# EAGLE board PR9025 (EAGLE 6.6.0)
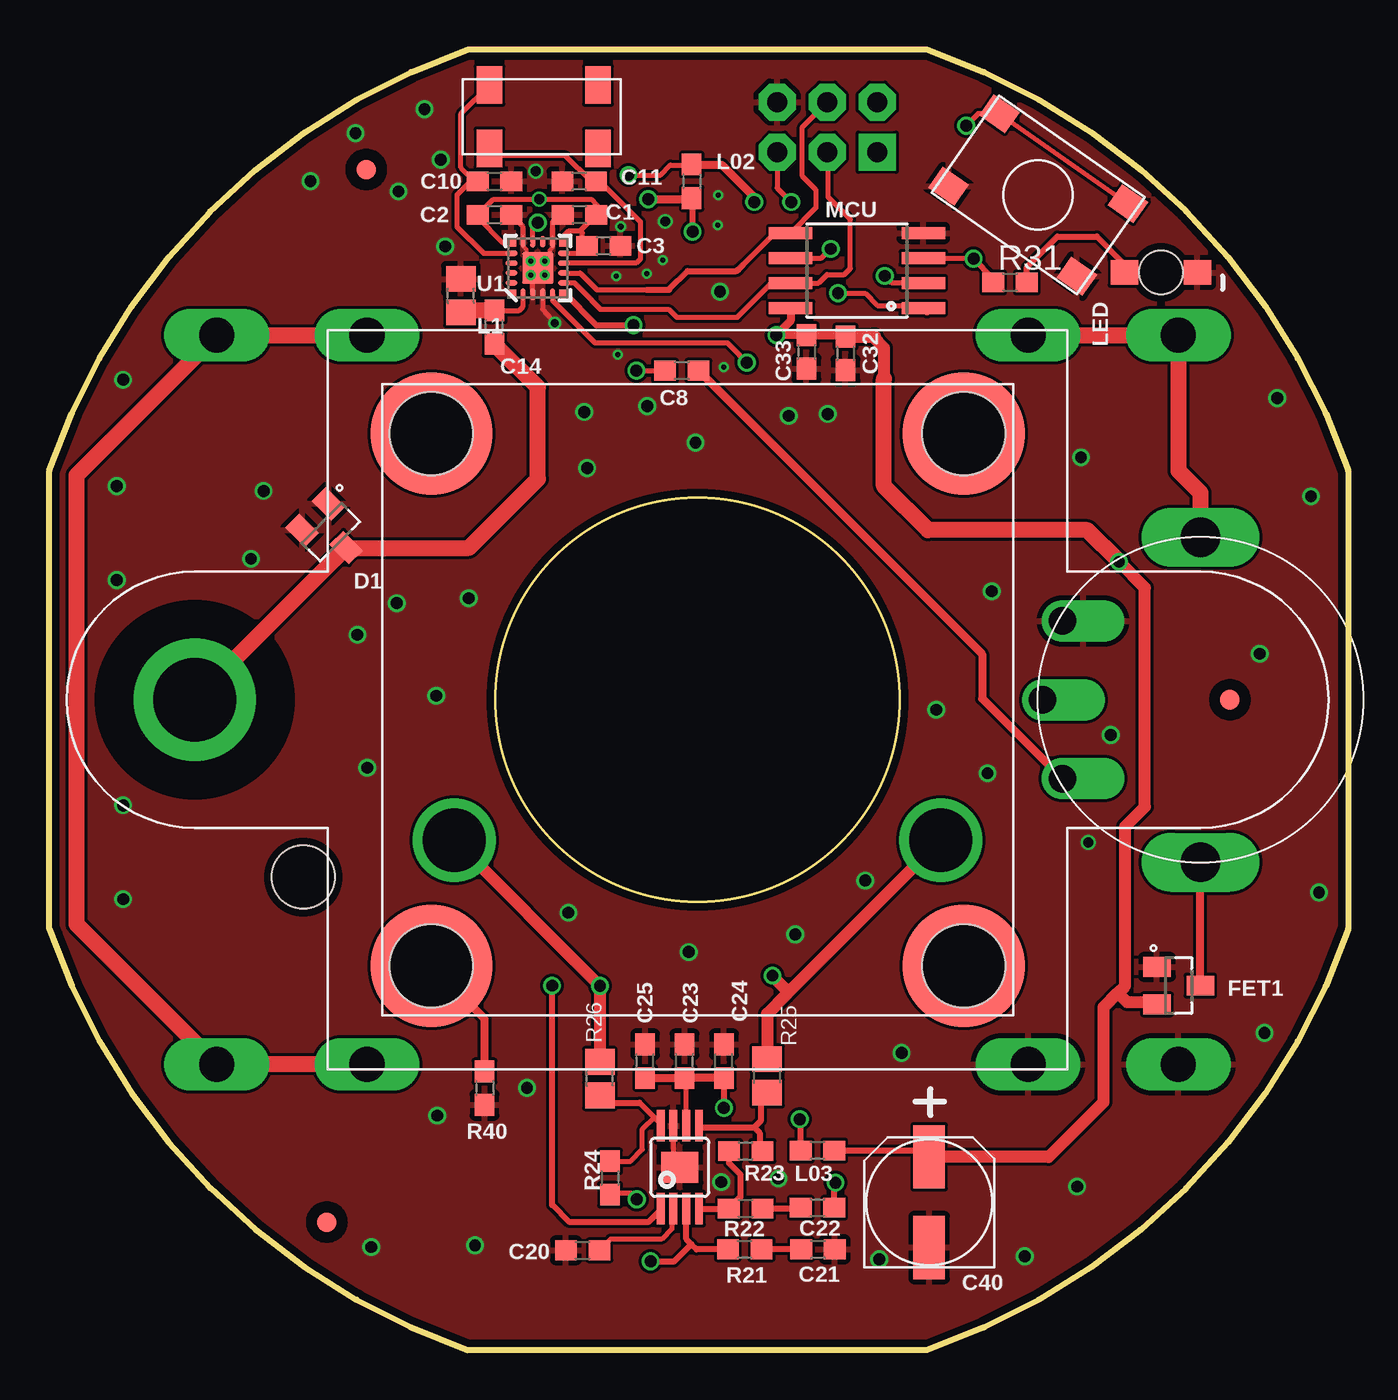
[diagram p0: board, top side]
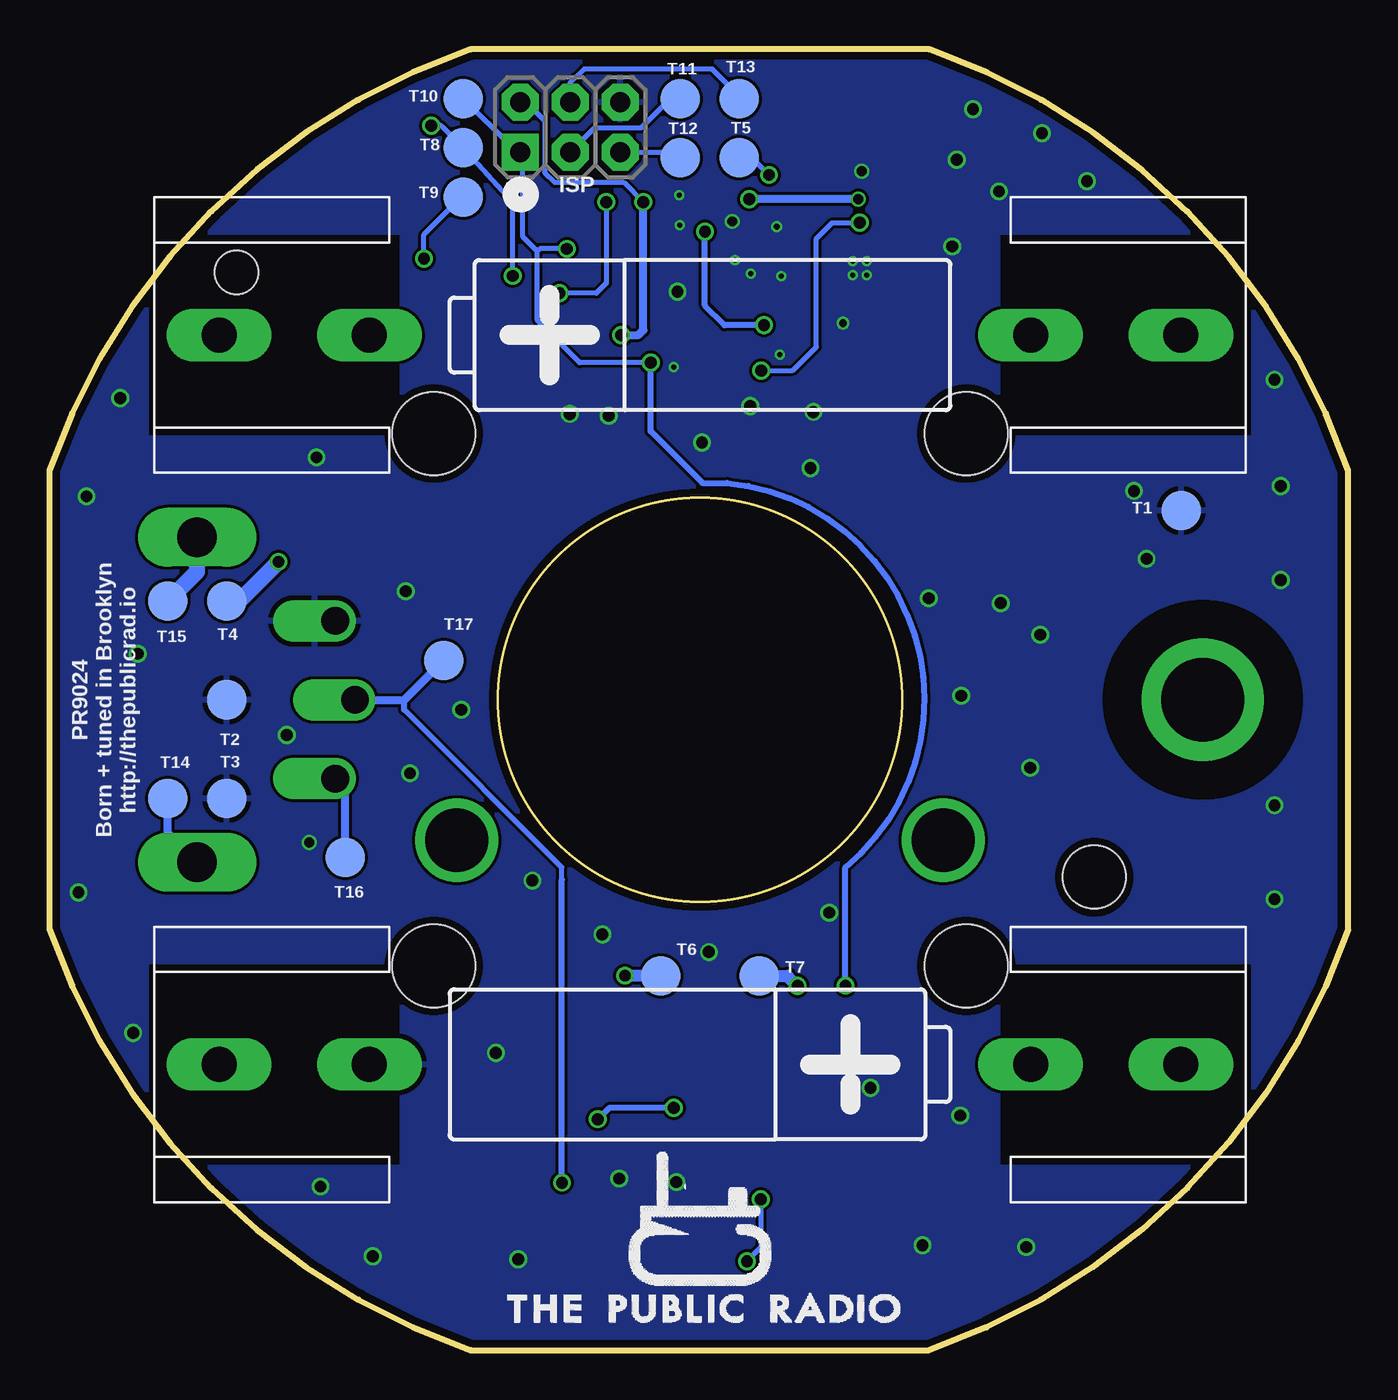
[diagram p1: board, bottom side, seen from below]

Size 65.88 x 66 mm. Coordinates in mm from the lower left corner, seen from the top.
Outline: 44.5,66 21.25,66 arc52 0,44.62 0,21.38 arc52 21.25,0 44.5,0
Outline: 44.52,0 44.5,0
Outline: 44.5,66 arc-52 65.88,44.62 65.88,21.38 arc-52 44.5,0
Copper layers (1*16): Top 0.0356mm / dielectric 1.5011mm / Bottom 0.0356mm
Design rules "LaenPCBOrder *": minimum track width 6mil, minimum drill 13mil, track to track 6mil, track to pad 6mil, pad to pad 6mil, via to via 6mil, smd to smd 6mil, copper to edge 15mil, drill to drill 6mil, minimum pad ring 7mil, minimum via ring 5mil, stop-mask expansion 3mil, vias tented up to drill 0mil, thermal gap 10mil
Net classes: 1 antenna: clearance 1.27 mm
Holes 3.2 mm at 12.88,24
tRestrict: area 24,54.1 to 25.6,55.7; 8 lines

## Footprints (pad centres in the part's own frame; a part is rotated, then mirrored left to right if it is on the bottom)
8-MSOP = smd 0.4 x 1.6: 1 -0.975,-2.1; 2 -0.325,-2.1; 3 0.325,-2.1; 4 0.975,-2.1; 5 0.975,2.1; 6 0.325,2.1; 7 -0.325,2.1; 8 -0.975,2.1 | smd 1.89 x 1.57: 9 0,0
PEM_M3 = drill 4.22 pad 6.2: P$2 0,0
0603_CPL = smd 1.1 x 1: 1 -0.85,0; 2 0.85,0
NICHICON_UD_63 = smd 1.6 x 3.2: P$1 0,2.3; P$2 0,-2.3
SOT23_CPL = smd 1.4 x 1: 1 -1.1,0.95; 2 -1.1,-0.95; 3 1.1,0
2X3-NS = drill 1.016 pad 1.88 square: 1 -2.54,-1.27 | drill 1.016 pad 1.88 octagon: 2 -2.54,1.27; 3 0,-1.27; 4 0,1.27; 5 2.54,-1.27; 6 2.54,1.27
BK92_AA_BATT = drill 1.778 long: NEG -24.384,0; NEG@2 -16.764,0; POS 16.764,0; POS@2 24.384,0
0805_ADAFRUIT = smd 1.3 x 1.5: 1 -0.85,0; 2 0.85,0
HSMC-C265_REVERSE_MOUN_LED = smd 1.4 x 1.25: P$1 -1.85,0; P$2 1.85,0 | hole 2.2: 0,0
FIDUCIAL_1MM = smd 1 x 1: 1 0,0
8-SOIC = smd 0.61 x 2.21: 1 -1.905,-3.378; 2 -0.635,-3.378; 3 0.635,-3.378; 4 1.905,-3.378; 5 1.905,3.353; 6 0.635,3.353; 7 -0.635,3.353; 8 -1.905,3.353
H17112NS_A10K_L20F-002 = drill 1.4 offset: GND -4,-7; SIGNAL 4,-7; WIPER 0,-8 | drill 2 long: SW_IN 8.25,0; SW_OUT -8.25,0
PR2024_SPKR_PLACE(SMD) = drill 3.2: P$5 -12.341,-7.125; P$6 12.341,-7.125
C&K_PTS645_SMT = smd 1.6 x 1.3: P$1 -3.975,2.25; P$2 3.975,2.25; P$3 -3.975,-2.25; P$4 3.975,-2.25
TP20R = smd 2 x 2: TP 0,0
SI470X_20_QFN = smd 0.34 x 0.34: 1 -1.275,1.265; 6 -1.265,-1.265; 11 1.265,-1.265; 16 1.265,1.265 | smd 0.61 x 0.28: 2 -1.335,0.75; 3 -1.335,0.25; 4 -1.335,-0.25; 5 -1.335,-0.75; 12 1.335,-0.75; 13 1.335,-0.25; 14 1.335,0.25; 15 1.335,0.75 | smd 0.28 x 0.61: 7 -0.75,-1.335; 8 -0.25,-1.335; 9 0.25,-1.335; 10 0.75,-1.335; 17 0.75,1.335; 18 0.25,1.335; 19 -0.25,1.335; 20 -0.75,1.335 | smd 1.6 x 1.6: 21 0,0
PEM_SMT = smd 6.2 x 6.2: P$1 0,0 | hole 4.22: 0,0
4-SOJ = smd 1.3 x 1.9: P$1 -2.75,-1.6; P$2 2.75,-1.6; P$3 2.75,1.6; P$4 -2.75,1.6

## Placement (x,y rotation side)
AMP  [8-MSOP]  31.98,9.29 0 top
ANT_MOUNT  DNP  [PEM_M3]  7.38,33 0 top
C1  22nF  [0603_CPL]  26.89,57.6 180 top
C2  22nF  [0603_CPL]  22.57,57.6 0 top
C3  .1uF  [0603_CPL]  28.11,56.03 0 top
C8  1uF  [0603_CPL]  32.08,49.7 0 top
C10  22pF  [0603_CPL]  22.57,59.3 0 top
C11  22pF  [0603_CPL]  26.88,59.3 180 top
C14  47pF  [0603_CPL]  22.57,51.9 90 top
C20  .22uF  [0603_CPL]  27.05,5.06 0 top
C21  .22uF  [0603_CPL]  38.99,5.12 180 top
C22  .22uF  [0603_CPL]  38.96,7.23 0 top
C23  .1uF  [0603_CPL]  32.22,14.66 90 top
C24  1uF  [0603_CPL]  34.22,14.66 90 top
C25  10uF  [0603_CPL]  30.22,14.66 90 top
C32  10uF  [0603_CPL]  40.38,50.58 270 top
C33  .1uF  [0603_CPL]  38.4,50.65 270 top
C40  220uF  [NICHICON_UD_63]  44.62,7.51 0 top
D1  [SOT23_CPL]  14.27,41.5 315 top
FET1  [SOT23_CPL]  57.27,18.5 0 top
ISP  [2X3-NS]  39.45,62.05 0 bottom
JP5  [BK92_AA_BATT]  32.88,51.5 180 bottom
JP6  [BK92_AA_BATT]  32.88,14.5 0 bottom
L1  180nH  [0805_ADAFRUIT]  20.88,53.5 90 top
L02  2.2k@100MHz  [0603_CPL]  32.58,59.3 270 top
L03  2.2k@100MHz  [0603_CPL]  38.96,10.13 180 top
LED  HSMC-C265_REVERSE_MOUNT_LED  [HSMC-C265_REVERSE_MOUN_LED]  56.38,54.67 0 top
MARK1  [FIDUCIAL_1MM]  14.07,6.5 0 top
MARK2  [FIDUCIAL_1MM]  16.07,59.9 0 top
MARK3  [FIDUCIAL_1MM]  59.88,33 0 top
MCU  [8-SOIC]  40.95,54.77 90 top
R1  VOLUME_POT  [H17112NS_A10K_L20F-002]  58.38,33 270 top
R21  12K  [0603_CPL]  35.27,5.12 180 top
R22  12K  [0603_CPL]  35.31,7.19 0 top
R23  100K  [0603_CPL]  35.32,10.11 0 top
R24  100K  [0603_CPL]  28.43,8.74 270 top
R25  0 ohm  [0805_ADAFRUIT]  36.41,13.92 90 top
R26  0 ohm  [0805_ADAFRUIT]  27.93,13.78 90 top
R31  1K  [0603_CPL]  48.73,54.17 0 top
R40  DNP  [0603_CPL]  22.07,13.3 270 top
SPKR_PLACE  DNP  [PR2024_SPKR_PLACE(SMD)]  32.88,33 0 top
SW1  C&K_PTS645  [C&K_PTS645_SMT]  50.15,58.61 145 top
T1  [TP20R]  8.47,42.6 0 bottom
T2  [TP20R]  56.88,33 0 bottom
T3  [TP20R]  56.88,28 0 bottom
T4  [TP20R]  56.88,38 0 bottom
T5  [TP20R]  30.88,60.5 0 bottom
T6  [TP20R]  34.88,19 0 bottom
T7  [TP20R]  29.88,19 0 bottom
T8  [TP20R]  44.88,61 0 bottom
T9  [TP20R]  44.88,58.5 0 bottom
T10  [TP20R]  44.88,63.5 0 bottom
T11  [TP20R]  33.88,63.5 0 bottom
T12  [TP20R]  33.88,60.5 0 bottom
T13  [TP20R]  30.88,63.5 0 bottom
T14  [TP20R]  59.88,28 0 bottom
T15  [TP20R]  59.88,38 0 bottom
T16  [TP20R]  50.88,25 0 bottom
T17  [TP20R]  45.88,35 0 bottom
U1  [SI470X_20_QFN]  24.77,54.9 90 top
U$1  [PR_LOGO]  32.88,7 0 bottom
U$2  PEM_SMT  [PEM_SMT]  19.38,46.5 0 top
U$3  PEM_SMT  [PEM_SMT]  46.38,46.5 0 top
U$4  PEM_SMT  [PEM_SMT]  46.38,19.5 0 top
U$5  PEM_M3_SMT_W/PIN  [PEM_SMT]  19.38,19.5 0 top
X1  [4-SOJ]  25.07,62.58 0 top

## Library data of the parts
AMP = PR_Parts_Library; MFG_PN: TPA6203A1DGNR
ANT_MOUNT R1 SPKR_PLACE U$1-U$5 = PR_Parts_Library
C1 C2 = PR_Parts_Library; MFG_PN: CL10B223KB8NNNC; TOL: 10%; VOLTAGE: 16V
C3 C23 C33 = PR_Parts_Library; MFG_PN: CL10B104KB8SFNC; TOL: 10%; VOLTAGE: 16V
C8 C24 = PR_Parts_Library; MFG_PN: CL10B105KP8NNNC; TOL: 10%; VOLTAGE: 10V
C10 C11 = PR_Parts_Library; MFG_PN: C1608C0G1H220J080AA; TOL: 5%; VOLTAGE: 50V
C14 = PR_Parts_Library; MFG_PN: CL10C470JB8NCNC; TOL: 5%; VOLTAGE: 50V
C20-C22 = PR_Parts_Library; MFG_PN: C1608X7R1C224K080AC; TOL: 10%; VOLTAGE: 16V
C25 C32 = PR_Parts_Library; MFG_PN: CL10A106MQ8NNNC; TOL: 20%; VOLTAGE: 6.3V
C40 = PR_Parts_Library; MFG_PN: UUD1C221MCL1GS; TOL: 20%; VOLTAGE: 16V
D1 = PR_Parts_Library; MFG_PN: BAV99,215
FET1 = PR_Parts_Library; MFG_PN: AO3435
ISP = PR_Parts_Library; MFG_PN: M20-9980346
JP5 JP6 = PR_Parts_Library; MFG_PN: 2 of BK92 - supplied by CL Labs
L1 = PR_Parts_Library; CURRENT: 400mA; DCR: 640m; MFG_PN: AISC-0805-R18J-T; TOL: 5%
L02 L03 = PR_Parts_Library; CURRENT: 150mA; DCR: 2.3; MFG_PN: HZ0603A222R-10
LED = PR_Parts_Library; MFG_PN: HSMC-C265
MARK1-MARK3 T1-T17 = PR_Parts_Library; MFG_PN: DNP
MCU = PR_Parts_Library; MFG_PN: ATTINY45-20SUR
R21 R22 = PR_Parts_Library; MFG_PN: RC0603FR-0712KL; POWER: 1/10W; TOL: 1%
R23 R24 = PR_Parts_Library; MFG_PN: ERJ-3EKF1003V; POWER: 1/10W; TOL: 1%
R25 R26 = PR_Parts_Library; MFG_PN: ERJ-6GEY0R00V
R31 = PR_Parts_Library; MFG_PN: 311-1.00KHRCT-ND
R40 = PR_Parts_Library; MFG_PN: ERJ-3GEY0R00V
SW1 = PR_Parts_Library; MFG_PN: PTS645SM43SMTR92 LFS
U1 = PR_Parts_Library; MFG_PN: Si4702 C19 GM - supplied by CL Labs
X1 = PR_Parts_Library; MFG_PN: ABS25-32.768KHZ-T

## Nets
3.3V: C1.1 C2.1 C3.1 L02.2 U1.6 U1.10 U1.11 U1.16
!RST: AMP.1 ISP.1 MCU.6 T10.TP U1.5
A_IN: C8.2 R1.SIGNAL T16.TP
A_OUT: C22.2 R1.WIPER T17.TP
ANT [antenna]: ANT_MOUNT.P$2 C14.1 D1.3
GND: AMP.7 AMP.9 C1.2 C2.2 C3.2 C10.2 C11.2 C20.1 C21.1 C23.2 C24.2 C25.2 C32.2 C33.2 C40.P$2 D1.1 D1.2 FET1.1 ISP.6 JP6.NEG JP6.NEG@2 L1.2 LED.P$2 MCU.4 R1.GND R40.2 SW1.P$1 SW1.P$2 T1.TP T2.TP T3.TP U1.3 U1.4 U1.12 U1.15 U1.21
GPIO1: U1.19
GPIO2: U1.18
LED/PB4: MCU.3 R31.1 T9.TP
N$1: C11.1 U1.9 X1.P$1
N$2: AMP.6 C23.1 C24.1 C25.1 L03.2
N$3: C22.1 R22.2
N$4: AMP.5 R23.2 R25.1
N$5: AMP.3 R21.2 R24.2
N$6: R40.1 U$5.P$1
N$7: LED.P$1 R31.2
N$9: C8.1 U1.14
N$10: C10.1 U1.17 X1.P$4
N$11: AMP.8 R24.1 R26.1
N$12: AMP.2 C20.2
N$13: JP5.NEG JP5.NEG@2 JP6.POS JP6.POS@2
N$14: AMP.4 R22.1 R23.1
N$16 [antenna]: C14.2 L1.1 U1.2
N$23: C21.2 R21.1
RESET: ISP.5 MCU.1 T12.TP
SCLK: ISP.3 MCU.7 T11.TP U1.7
SDIO: ISP.4 MCU.5 T13.TP U1.8
SPK_OUT+: R25.2 SPKR_PLACE.P$6 T6.TP
SPK_OUT-: R26.2 SPKR_PLACE.P$5 T7.TP
SW: MCU.2 SW1.P$3 SW1.P$4 T8.TP
SW_IN: FET1.3 R1.SW_IN T14.TP
SW_OUT: JP5.POS JP5.POS@2 R1.SW_OUT T15.TP
VCC: C32.1 C33.1 C40.P$1 FET1.2 ISP.2 L02.1 L03.1 MCU.8 T4.TP T5.TP

## Tracks (layer width: path | path; a pad name or v marks a point on that pad's centre or on a via)
3.3V  (via drill 0.5, 0.6)
  Top 0.254: 23.11,56.16 U1.16 23.48,56.2 22.98,56.2 21.73,57.45 C2.1 22.52,58.39 v24.86,58.39 27.48,58.39 27.77,58.1 27.77,57.64 C1.1 | U1.10 26.23,55.65 | U1.11 26.04,56.48 26.34,56.79 26.93,56.79 | 26.93,56.79 C1.1 | 27.68,57.66 C1.1 | U1.10 26.95,55.65 C3.1 | U1.10 26.8,55.65 27.04,55.88 27.04,56.68 26.93,56.79
  Top 0.305: U1.6 26.09,53.63 arc-45 26.13,53.62 27.75,52 v29.62,52 | v32.62,56.75 32.62,58.37 arc45 32.61,58.42 L02.2
  Top 0.406: v30.38,58.4 32.52,58.4 L02.2
  Top 0.61: L02.2 32.58,58.4
  Bottom 0.305: v29.62,52 31.6,52 arc45 31.64,52.02 32.62,53 v32.62,56.75
  Bottom 0.406: v24.86,58.39 30.16,58.39 v30.38,58.4
!RST  (via drill 0.6)
  Top 0.254: v35.38,50.1 34.98,50.5 35,50.5 34.4,51.1 27.68,51.1 25.52,53.25 U1.5 | MCU.6 39.16,55.41 v39.62,55.88 | AMP.1 31,6.88
  Top 0.305: AMP.1 31,7.12 30.38,6.5 26.38,6.5 25.5,7.38 v25.5,18.5
  Bottom 0.254: v39.62,55.88 41,55.88 41.12,55.75 | v35.38,50.1 38.98,50.1 41.12,52.25 41.12,55.75 | 41.12,55.75 41.88,56.5 41.88,60.66 ISP.1 42.24,61.03 42.41,61.03 T10.TP
  Bottom 0.305: v35.38,50.1 35.38,46.62 32.77,44.02 arc-45 32.72,44 31.5,44 arc135 25.5,24.5 v25.5,18.5
A_IN
  Top 0.406: C8.2 47.31,35.31 47.31,33.06 R1.SIGNAL
  Bottom 0.406: T16.TP 50.88,28.5 R1.SIGNAL
A_OUT  (via drill 0.6)
  Top 0.305: C22.2 39.81,8.44 v39.88,8.5
  Bottom 0.254: 39.88,23.88 39.88,24.5 47.88,32.5
  Bottom 0.305: v39.88,8.5 39.88,23.88 | 47.88,32.5 47.88,33
  Bottom 0.406: T17.TP 47.88,33 R1.WIPER
ANT
  Top 0.406: 22.73,51.05 C14.1
  Top 0.813: ANT_MOUNT.P$2 7.38,33.04 D1.3 15.07,40.7 21.27,40.7 24.77,44.2 24.77,48.85 C14.1
GND  (via drill 0.25, 0.25 pad 0.1, 0.3, 0.4, 0.5, 0.6)
  Top 0.2: U1.12 25.52,55.95 25.38,55.8 25.38,55.5 v25.12,55.25 | 24.21,55.46 v24.43,55.25 24.19,55.49 24.19,55.84 24.02,56 U1.15 | 25.02,54.44 v25.14,54.55
  Top 0.254: v25.12,55.25 U1.21 | v24.43,55.25 v24.43,55.24 24.44,55.23 | U1.15 24.02,57 C2.2 | U1.12 25.52,57.25 25.88,57.6 C1.2 | U1.4 25.02,52.8 v25.62,52.1 | U1.3 24.52,54.45 v24.43,54.55 | AMP.7 31.65,9.61 AMP.9
  Top 0.305: 31.65,9.13 AMP.9
  Top 0.406: 31.65,9.13 31.65,8.73 31.67,8.71
  other vias: 30.33,47.9 62.28,48.3 27.27,44.75 16.32,5.24 19.68,11.9 37.83,21.1 19.03,62.95 24.23,13.31 39.48,47.5 19.86,60.4 17.71,58.78 13.24,59.31 52.12,8.3 61.62,16.1 27.12,47.6 17.62,37.9 21.27,38.15 19.62,33.2 32.77,46.05 15.53,61.74 16.12,29.55 20.09,56 37.5,47.4 15.62,36.3 10.22,40.15 10.87,43.59 24.68,59.81 28.98,57 43.23,15.09 44.99,32.49 47.8,38.5 52.33,45.3 28.75,54.5 30.3,54.62 31.1,55.3 33.9,57.08 33.92,58.6 34.2,49.88 28.82,50.5 31.23,57.27 52.69,25.76 42.09,4.61 32.42,20.2 26.32,22.2 3.74,22.88 3.74,27.64 3.42,39.08 3.42,43.84 3.74,49.23 21.59,5.33 63.99,43.32 64.39,23.22 61.39,35.33 49.47,4.77 34.07,8.53 36.98,8.71 53.83,31.21 47.58,29.27 41.38,23.82 34.01,53.7
  pour Bottom: -0.12,66 65.88,66 65.88,0 -0.12,0
  pour Top: -0.12,66 65.88,66 65.88,0 -0.12,0
LED/PB4  (via drill 0.6)
  Top 0.254: v46.88,55.38 44.36,55.38 MCU.3
  Top 0.305: v46.88,55.38 47.86,54.39 arc-45 47.88,54.35 R31.1
  Bottom 0.254: v46.88,55.38 46.88,56.6 44.98,58.5 T9.TP
N$1
  Top 0.254: X1.P$1 22.62,60.6 26.18,60.6 27.48,59.3 C11.1 | C11.1 27.57,59.3 | C11.1 27.93,59.3 29.98,57.25 29.98,55.36 29.77,55.15 U1.9
N$2  (via drill 0.6)
  Top 0.254: AMP.6 32.3,13.73 C23.1
  Top 0.305: C24.1 v34.21,12.29 | L03.2 38.11,11.66 v38.05,11.72
  Top 0.406: C24.1 C23.1 | C23.1 32.14,13.81 | C25.1 C23.1
  Bottom 0.305: 34.2,12.28 v34.21,12.29 37.48,12.29 v38.05,11.72
N$3
  Top 0.305: R22.2 38.08,7.19 C22.1
N$4
  Top 0.254: AMP.5 | 36.23,12.9 R25.1
  Top 0.305: AMP.5 33.04,11.3 35.74,11.3 | 35.74,11.3 36.02,11.02 36.02,10.25 R23.2 | 35.74,11.3 36.09,11.65 36.09,12.76 R25.1
  Top 0.406: R23.2 36.48,9.86
N$5  (via drill 0.6)
  Top 0.254: v29.8,7.66 29.5,7.96 28.5,7.96 R24.2
  Top 0.305: AMP.3 32.27,6.69 32.31,6.64 32.31,5.63 32.56,5.38 | R21.2 32.83,5.12 32.56,5.38 | v30.49,4.51 31.69,4.51 32.56,5.38
  Bottom 0.254: v29.8,7.66 29.8,5.21 v30.49,4.51
N$6
  Top 0.406: R40.1 22.07,16.8 U$5.P$1
N$7
  Top 0.305: R31.2 49.58,54.92 arc-45 49.59,54.97 51.12,56.5 53.1,56.5 arc-45 53.14,56.48 54.38,55.25 54.38,54.85 arc45 54.39,54.81 LED.P$1
N$9  (via drill 0.6)
  Top 0.254: U1.14 24.52,56.95 v24.77,57.2 | v29.77,49.7 C8.1
  Bottom 0.254: v29.77,49.7 28.18,49.7 26.98,50.9 26.98,56.4 26.18,57.2 v24.77,57.2
N$10
  Top 0.254: U1.17 22.02,55.65 20.68,57 20.68,58.6 21.38,59.3 C10.1 | C10.1 21.68,59.2 | X1.P$4 20.88,62.73 20.88,60 21.57,59.3 C10.1
N$11
  Top 0.254: 28.43,12.71 R26.1 | AMP.8 31,11.49 30.67,11.82 | 30.67,11.82 29.94,12.56 | R24.1 29.48,9.59 30.08,10.18 30.08,11.23 30.67,11.82
  Top 0.305: 29.94,12.56 28.57,12.56 28.43,12.71
  Top 0.406: 31,10.94 AMP.8
N$12
  Top 0.254: AMP.2 31.58,6.63 31.58,6.15 31.05,5.63 28.47,5.63 C20.2
N$13
  Top 0.813: JP6.POS JP6.POS@2 1.38,21.62 1.38,44.38 JP5.NEG JP5.NEG@2
N$14
  Top 0.254: 34.77,6.94 R22.1
  Top 0.305: AMP.4 R22.1 35.05,7.78 35.05,8.92 34.47,9.5 R23.1
N$16
  Top 0.254: C14.2 23.82,52.75 24.02,52.95 U1.2
  Top 0.813: C14.2 20.98,52.75 L1.1
N$21
  pour Bottom: 
N$23
  Top 0.305: C21.2 R21.1
RESET  (via drill 0.6)
  Top 0.254: ISP.5 36.91,58.97 v37.62,58.25 | v40,53.62 41.38,53.62 42,53 44.2,53 MCU.1
  Top 0.406: 44.5,52.7 MCU.1
  Bottom 0.254: ISP.5 34.16,60.78 T12.TP | v37.62,58.25 37.62,54.12 38.12,53.62 v40,53.62
SCLK
  Top 0.254: ISP.3 39.5,60.73 39.5,58.5 40.62,57.38 40.62,54.88 40.33,54.58 39.45,54.58 39.02,54.14 MCU.7 37.58,54.12 36.62,54.12 34.9,52.4 31.83,52.4 31.41,52.81 27.94,52.81 27.48,53.27 27.48,53.3 26.62,54.15 U1.7
  Bottom 0.254: T11.TP 34.38,63.5 35.88,62 38.23,62 ISP.3
SDIO
  Top 0.254: ISP.4 38.19,62.06 38.19,59.56 38.88,58.88 38.88,57.96 MCU.5 37.54,56.62 36.75,56.62 35.17,55.05 | U1.8 26.93,54.65 27.77,53.8 30.27,53.8
  Top 0.305: 35.17,55.05 34.94,54.82 arc-45 34.9,54.8 34.87,54.77 arc-45 34.82,54.75 32.38,54.75 31.44,53.82 arc-45 31.4,53.8 30.27,53.8
  Bottom 0.254: T13.TP 30.88,63.62 32.25,65 38.75,65 39.5,64.25 39.5,63.37 ISP.4
SPK_OUT+  (via drill 0.6)
  Top 0.61: SPKR_PLACE.P$6 37.36,18.02 | 37.36,18.02 36.41,17.06 R25.2 | v36.67,19 37.36,18.32 37.36,18.02
  Bottom 0.61: T6.TP v36.67,19
SPK_OUT-  (via drill 0.6)
  Top 0.61: SPKR_PLACE.P$5 v27.93,18.48 27.93,18 R26.2
  Bottom 0.61: T7.TP 28.44,19 v27.93,18.48
SW  (via drill 0.6)
  Top 0.254: 44.41,54.05 MCU.2 42.73,54.14 v42.38,54.5 | SW1.P$3 SW1.P$4 47.11,62.74 v46.5,62.12
  Bottom 0.254: v42.38,54.5 42.38,58.25 T8.TP | 45.5,60.62 45.25,60.62 T8.TP | v46.5,62.12 46,62.12 T8.TP
SW_IN
  Top 0.406: FET1.3 R1.SW_IN
  Bottom 0.406: R1.SW_IN 59.88,26.25 T14.TP
SW_OUT
  Top 0.813: JP5.POS JP5.POS@2 57.26,44.62 58.38,43.5 R1.SW_OUT
  Bottom 0.813: T15.TP 58.38,39.5 R1.SW_OUT
VCC  (via drill 0.6)
  Top 0.254: v29.38,59.62 31,59.62 31.5,60.12 32.55,60.12 L02.1
  Top 0.305: L03.1 44.3,10.13 C40.P$1
  Top 0.406: C32.1 40.3,51.5 C33.1 v36.88,51.5 37.6,52.22 MCU.8 | v35.75,58.25 35.75,58.5 34.12,60.12 32.6,60.12 L02.1
  Top 0.61: C40.P$1 50.69,9.81 53.48,12.6 53.48,17.4 54.19,18.12 | C32.1 41.75,51.42 | 41.75,51.42 41.88,51.42 | 54.19,18.12 54.56,18.49 54.56,26.56 55.56,27.56 55.56,38.69 v54.25,40 | 55.98,17.65 54.66,17.65 54.19,18.12 | 41.75,51.42 42.33,50.85 42.33,49.27
  Top 0.813: 55.98,17.65 FET1.2 | 42.33,49.27 42.33,43.85 44.58,41.6 52.65,41.6 v54.25,40
  Bottom 0.254: ISP.2 41.7,63.32 40.75,62.38 40.75,59.75 40.25,59.25 36.75,59.25 v35.75,58.25 | T5.TP 30.25,60.5 v29.38,59.62
  Bottom 0.406: v36.88,51.5 36,51.5 35.75,51.75 v35.75,58.25 | T5.TP 30.75,60.5
  Bottom 0.813: T4.TP 56.25,38 v54.25,40

## Text on the board
bNames: PR9024 / Born + tuned in Brooklyn / http://thepublicrad.io